# Altium PCB PCB1.PcbDoc
Units mm, origin at the board's own origin, x right, y up, seen from the top; angles counter-clockwise.
Board outline 70 x 90 mm, 2 copper layers (Top Layer, Bottom Layer); 16 components, 62 nets, 154 pads, 165 vias.
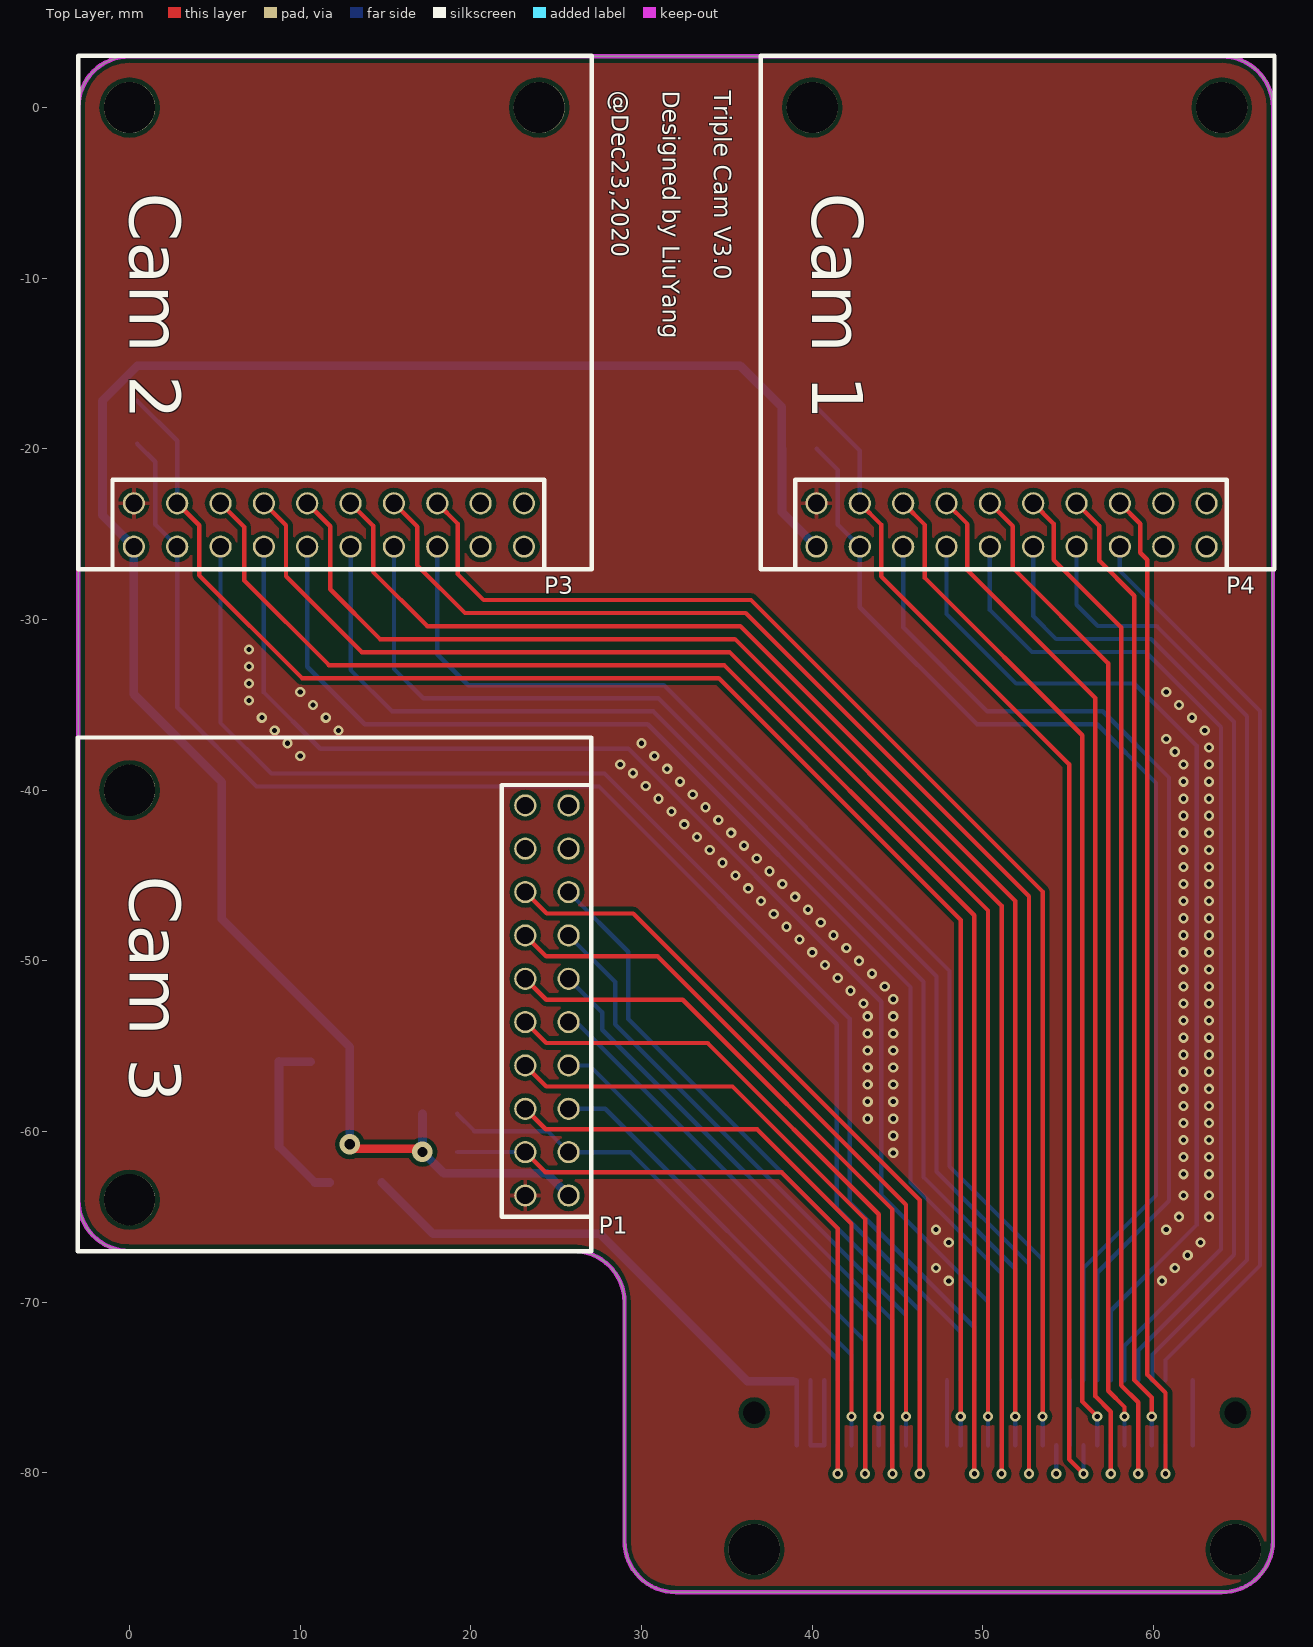
[diagram p0: Top Layer view]
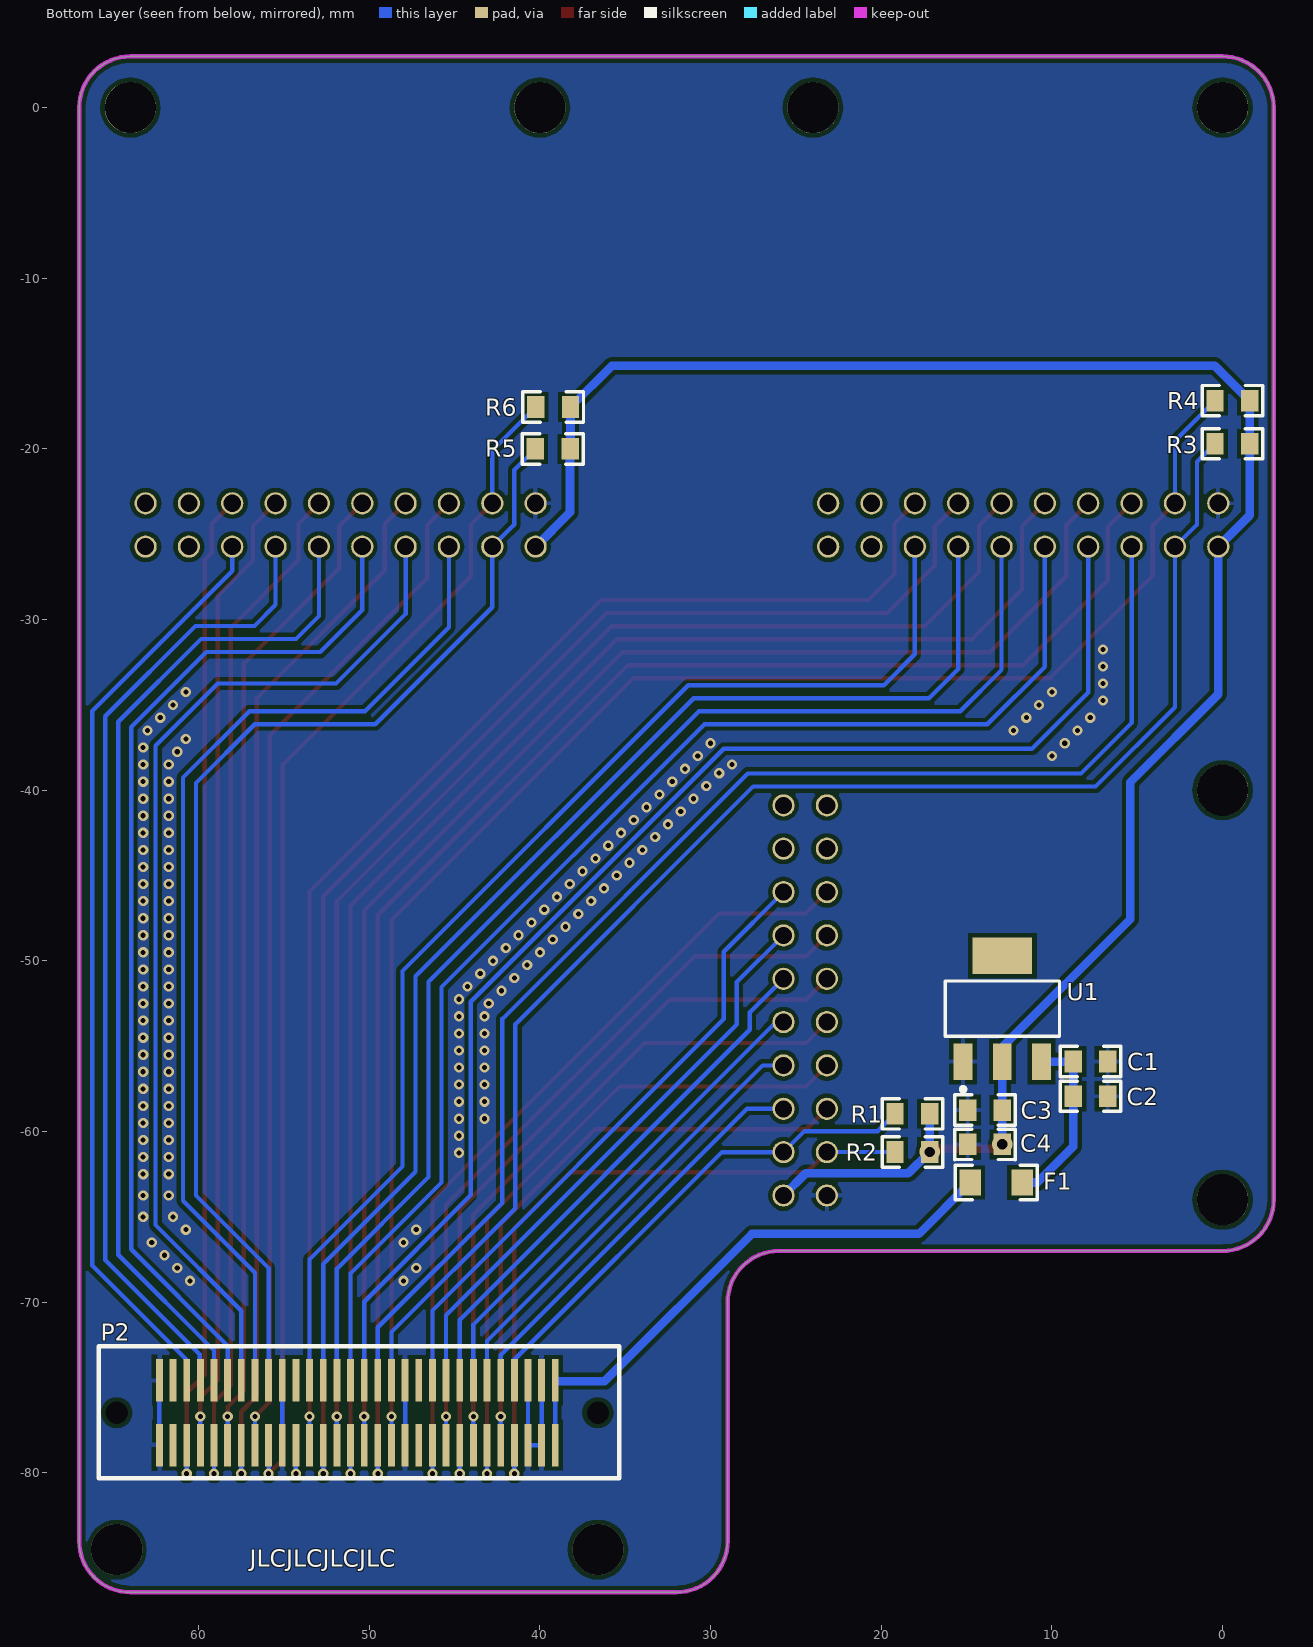
[diagram p1: Bottom Layer view, seen from below]
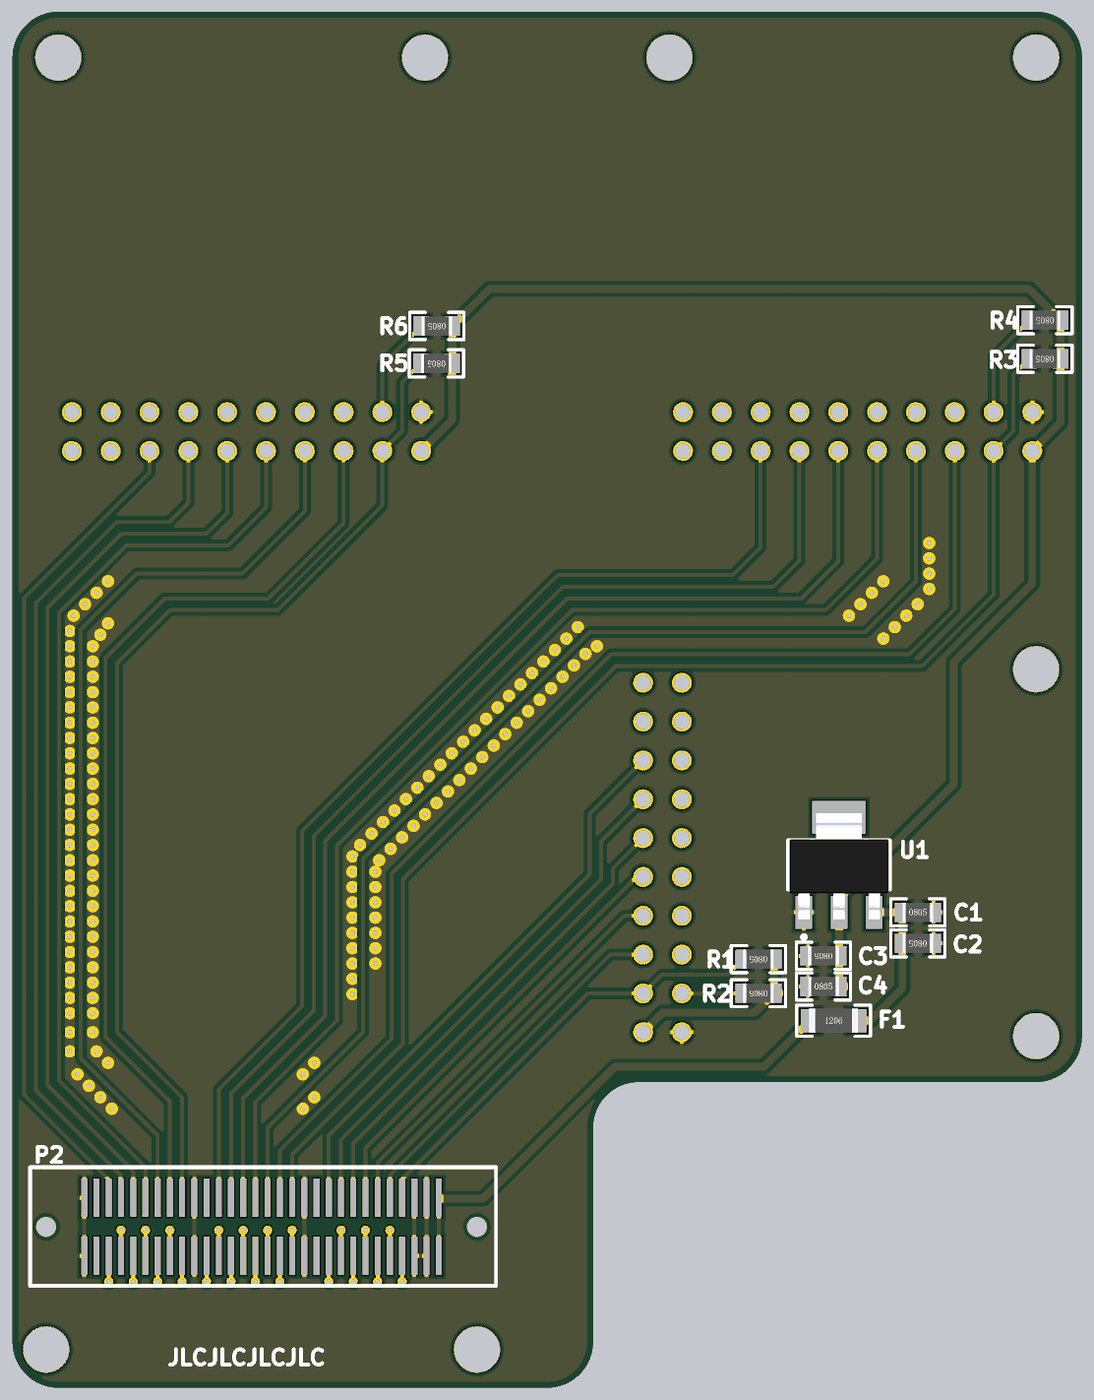
[diagram p2: 3D render of the assembled board from below, using the file's embedded part models]

## Layer stack, top to bottom
Top Solder: solder mask 0.0102, Solder Resist, Dk 3.5
Top Layer: signal copper 0.0356
Dielectric 1: dielectric 0.32, FR-4, Dk 4.8
Bottom Layer: signal copper 0.0356
Bottom Solder: solder mask 0.0102, Solder Resist, Dk 3.5

## Board outline
0,-67 cw(c0,-64) -3,-64 -3,0 cw(c0,0) 0,3 64,3 cw(c64,0) 67,0 67,-84 cw(c64,-84) 64,-87 32,-87 cw(c32,-84) 29,-84 29,-70 ccw(c26,-70) 26,-67

## Design rules (kind name [scope] priority, off if disabled: settings)
Clearance [All] p1: gap=0.254 except(0.508: Track-Track)
PolygonConnect [All] p1: connectstyle=Relief reliefconductorwidth=0.254 reliefentries=4 polygonreliefangle="90 Angle" airgapwidth=0.254
RoutingVias [All] p1: holewidth=0.3 width=0.6 viastyle="Through Hole" minholewidth=0.3 minwidth=0.6 maxholewidth=6 maxwidth=10
SolderMaskExpansion [All] p1: expansion=0.102
Width [All] p1: maxlimit=0.508 minlimit=0.127 preferedwidth=0.254
30 further rules are at their usual default settings.

## Classes and differential pairs
net class C1: D0_1 D0_2 D0_3 D1_1 D1_2 D1_3 D2_1 D2_2 D2_3 D3_1 D3_2 D3_3 D4_1 D4_2 D4_3 D5_1 D5_2 D5_3 D6_1 D6_2 D6_3 D7_1 D7_2 D7_3 HS_1 HS_2 HS_3 PCLK_1 PCLK_2 PCLK_3 SCK_1 SCK_2 SCK_3 SDA_1 SDA_2 SDA_3 VS_1 VS_2 VS_3 XCLK_1 XCLK_2 XCLK_3

## Components (designator, comment, footprint, x,y, rotation, side; value= is the part's Value field where it differs from the comment)
C1 "Cap2" R0805 7.74,-55.902 r180 bottom
C2 "Cap" R0805 7.74,-57.934 r0 bottom
C3 "Cap2" R0805 13.919,-58.747 r0 bottom
C4 "Cap" R0805 13.919,-60.753 r180 bottom
F1 "Fuse 1" R1206 13.259,-62.989 r180 bottom (schematic designator F?)
P1 "Header 10X2" PCBComponent_1 -3,-67 r90 top locked
P2 "Header 30X2" BTBCON_0.8mm_60P 39.1,-74.575 r270 bottom locked
P3 "Header 10X2" PCBComponent_1 -3,3 r0 top locked
P4 "Header 10X2" PCBComponent_1 37,3 r0 top locked
R1 "Res1" R0805 18.177,-58.962 r0 bottom
R2 "Res1" R0805 18.177,-61.197 r0 bottom
R3 "Res1" R0805 -0.575,-19.7 r0 bottom
R4 "Res1" R0805 -0.575,-17.175 r0 bottom
R5 "Res1" R0805 39.25,-20 r0 bottom
R6 "Res1" R0805 39.225,-17.55 r0 bottom
U1 "AMS1117-33" "SOT-223   AMS1117" 12.903,-52.803 r180 bottom

## Footprints (in the part's own frame and the unit in brackets; to place one, negate y for a bottom-side part, rotate by r counter-clockwise, add the part's x,y. Pads: shape width x height; smd on the part's side, far side on the other; paste and mask are expansions set on the pad)
BTBCON_0.8mm_60P [mm]
  rect 2.5x0.4 smd: 1(0,0) 2(3.8,0) 3(0,-0.8) 4(3.8,-0.8) 5(0,-1.6) 6(3.8,-1.6) 7(0,-2.4) 8(3.8,-2.4) 9(0,-3.2) 10(3.8,-3.2) 11(0,-4) 12(3.8,-4) 13(0,-4.8) 14(3.8,-4.8) 15(0,-5.6) 16(3.8,-5.6) 17(0,-6.4) 18(3.8,-6.4) 19(0,-7.2) 20(3.8,-7.2) 21(0,-8) 22(3.8,-8) 23(0,-8.8) 24(3.8,-8.8) 25(0,-9.6) 26(3.8,-9.6) 27(0,-10.4) 28(3.8,-10.4) 29(0,-11.2) 30(3.8,-11.2) 31(0,-12) 32(3.8,-12) 33(0,-12.8) 34(3.8,-12.8) 35(0,-13.6) 36(3.8,-13.6) 37(0,-14.4) 38(3.8,-14.4) 39(0,-15.2) 40(3.8,-15.2) 41(0,-16) 42(3.8,-16) 43(0,-16.8) 44(3.8,-16.8) 45(0,-17.6) 46(3.8,-17.6) 47(0,-18.4) 48(3.8,-18.4) 49(0,-19.2) 50(3.8,-19.2) 51(0,-20) 52(3.8,-20) 53(0,-20.8) 54(3.8,-20.8) 55(0,-21.6) 56(3.8,-21.6) 57(0,-22.4) 58(3.8,-22.4) 59(0,-23.2) 60(3.8,-23.2)
  round 1 hole 1.3: 61(1.9,2.5) 62(1.9,-25.7)
  silkscreen extent -2,-26.75 5.75,3.75
PCBComponent_1 [mm]
  round 3 hole 3: 0(3,-3) 0(27,-3)
  round 1.3 hole 1: 1(3.251,-28.727) 2(3.251,-26.187) 3(5.791,-28.727) 4(5.791,-26.187) 5(8.331,-28.727) 6(8.331,-26.187) 7(10.871,-28.727) 8(10.871,-26.187) 9(13.411,-28.727) 10(13.411,-26.187) 11(15.951,-28.727) 12(15.951,-26.187) 13(18.491,-28.727) 14(18.491,-26.187) 15(21.031,-28.727) 16(21.031,-26.187) 17(23.571,-28.727) 18(23.571,-26.187) 19(26.111,-28.727) 20(26.111,-26.187)
  silkscreen extent -0.01,-30.06 30.09,0.04
R0805 [mil]
  rect 40x50 smd: 1(-40,0) 2(40,0)
  silkscreen extent -70,-35 70,35, body extent -39,-25 39,25, height 22
R1206 [mil]
  rect 50x60 smd: 1(-60,0) 2(60,0)
  silkscreen extent -95,-40 95,40, body extent -63,-31 63,31, height 24
"SOT-223   AMS1117" [mm] "SOT-223/SC-73; 4 Leads; Body 6.7 x 7.3 mm, inc. leads (LxW max)"
  rect 1.1x2.15 smd: 1(-2.3,-3.1) 2(0,-3.1) 3(2.3,-3.1)
  rect 3.5x2.15 smd: 4(0,3.1)
  silkscreen extent -3.35,-4.85 3.35,1.63, body extent -3.25,-3.58 3.25,3.38, height 1.65

## Part data
C1 C2 C3 C4: "Capacitor"
F1: "Fuse"
P1 P3 P4: "Header, 10-Pin, Dual row"
P2: "Header, 30-Pin, Dual row"
R1 R2 R3 R4 R5 R6: "Resistor"
U1: library part "Volt Reg", "Voltage Regulator"

## Via types
v1: diameter 0.6, hole 0.3, Top Layer to Bottom Layer, 161 vias
v2: diameter 1.2, hole 0.6, Top Layer to Bottom Layer, 2 vias
v3: diameter 3, hole 3, Top Layer to Bottom Layer, 2 vias

## Nets (pads, with @x,y where several pads share a name; then routed paths per layer and width w, separated by ;. In a path a pad name is that pad's centre, name@x,y a point inside that pad or via, vN(x,y) a via of type N, cw(c..) or ccw(c..) an arc to the next point about the centre after c; other vN are vias at no path point)
3V3: C3.1 C4.2 P1.1 P3.1 P4.1 R1.1 R2.1 R3.1 R4.1 R5.1 R6.1 U1.2 | length 116.6
  Top Layer w0.508: v2(12.903,-60.753) 13.161,-61.011 16.974,-61.011 v2(17.161,-61.197)
  Bottom Layer w0.508: v2(12.903,-60.753) C3.1 12.903,-55.053 5.4,-47.55 5.4,-39.525 0.251,-34.376 P3.1 -1.591,-23.885 R3.1 R4.1 0.459,-15.125 35.784,-15.125 R6.1 38.209,-19.975 R5.1 38.234,-23.71 P4.1 ; R1.1 v2(17.161,-61.197) 18.413,-62.45 24.429,-62.45 P1.1
5V: F1.1 P2.1 P2.2 | length 32.7
  Bottom Layer w0.254: P2.2 P2.1
  Bottom Layer w0.508: F1.1 17.794,-66 27.575,-66 36.2,-74.625 38.875,-74.625
D0_1: P1.16 P2.20 | length 48.3
  Top Layer w0.254: P1.16 24.442,-47.224 29.509,-47.224 46.3,-64.014 v1(46.3,-80.052)
  Bottom Layer w0.254: v1(46.3,-80.052) P2.20
D0_2: P2.38 P3.16 | length 79.1
  Top Layer w0.254: P3.16 19.222,-24.379 19.222,-27.335 20.746,-28.859 36.418,-28.859 53.5,-45.941 v1(53.5,-76.698)
  Bottom Layer w0.254: P2.38 v1(53.5,-76.698)
D0_3: P2.56 P4.16 | length 59.6
  Top Layer w0.254: P4.16 59.227,-24.384 59.227,-26.091 59.634,-26.497 59.634,-74.244 60.7,-75.31 v1(60.7,-80.052)
  Bottom Layer w0.254: v1(60.7,-80.052) P2.56
D1_1: P1.15 P2.19 | length 37.1
  Bottom Layer w0.254: P1.15 29.224,-49.465 29.224,-53.408 46.3,-70.484 P2.19
D1_2: P2.37 P3.15 | length 70.3
  Bottom Layer w0.254: P3.15 18.031,-32.037 19.844,-33.85 31.308,-33.85 48.05,-50.592 48.05,-62.042 53.5,-67.492 P2.37
D1_3: P2.55 P4.15 | length 54.5
  Bottom Layer w0.254: P4.15 58.031,-27.148 66.238,-35.355 66.238,-67.848 60.7,-73.386 P2.55
D2_1: P1.14 P2.18 | length 42.9
  Top Layer w0.254: P1.14 24.417,-49.738 30.946,-49.738 45.5,-64.292 v1(45.5,-76.698)
  Bottom Layer w0.254: P2.18 v1(45.5,-76.698)
D2_2: P2.36 P3.14 | length 83.6
  Top Layer w0.254: P3.14 16.86,-24.556 16.86,-26.827 19.654,-29.621 36.103,-29.621 52.7,-46.219 v1(52.7,-80.052)
  Bottom Layer w0.254: v1(52.7,-80.052) P2.36
D2_3: P2.54 P4.14 | length 57
  Top Layer w0.254: P4.14 56.814,-24.511 56.814,-26.548 58.872,-28.605 58.872,-74.559 59.9,-75.587 v1(59.9,-76.698)
  Bottom Layer w0.254: P2.54 v1(59.9,-76.698)
D3_1: P1.13 P2.17 | length 34.3
  Bottom Layer w0.254: P1.13 28.462,-51.243 28.462,-53.724 45.5,-70.762 P2.17
D3_2: P2.35 P3.13 | length 72.3
  Bottom Layer w0.254: P3.13 15.491,-32.901 17.203,-34.612 30.992,-34.612 47.288,-50.908 47.288,-62.358 52.7,-67.77 P2.35
D3_3: P2.53 P4.13 | length 57.3
  Bottom Layer w0.254: P4.13 55.491,-29.136 56.731,-30.376 60.181,-30.376 65.476,-35.671 65.476,-67.533 59.938,-73.071 59.938,-74.537 P2.53
D4_1: P1.12 P2.16 | length 44.3
  Top Layer w0.254: P1.12 24.417,-52.278 32.409,-52.278 44.7,-64.569 v1(44.7,-80.052)
  Bottom Layer w0.254: v1(44.7,-80.052) P2.16
D4_2: P2.34 P3.12 | length 82.1
  Top Layer w0.254: P3.12 14.269,-24.506 14.269,-27.208 17.444,-30.383 35.787,-30.383 51.9,-46.496 v1(51.9,-76.698)
  Bottom Layer w0.254: P2.34 v1(51.9,-76.698)
D4_3: P2.52 P4.12 | length 61.1
  Top Layer w0.254: P4.12 54.147,-24.384 54.147,-26.497 58.11,-30.46 58.11,-74.875 59.1,-75.865 v1(59.1,-80.052)
  Bottom Layer w0.254: v1(59.1,-80.052) P2.52
D5_1: P1.11 P2.15 | length 31.4
  Bottom Layer w0.254: P1.11 27.7,-53.021 27.7,-54.039 44.7,-71.039 P2.15
D5_2: P2.33 P3.11 | length 73.9
  Bottom Layer w0.254: P3.11 12.951,-32.951 15.374,-35.374 30.677,-35.374 46.526,-51.223 46.526,-62.673 51.9,-68.047 P2.33
D5_3: P2.51 P4.11 | length 59.3
  Bottom Layer w0.254: P4.11 52.951,-29.797 54.292,-31.138 59.866,-31.138 64.714,-35.986 64.714,-67.217 59.1,-72.831 P2.51
D6_1: P1.10 P2.14 | length 38.9
  Top Layer w0.254: P1.10 24.417,-54.818 33.871,-54.818 43.9,-64.847 v1(43.9,-76.698)
  Bottom Layer w0.254: P2.14 v1(43.9,-76.698)
D6_2: P2.32 P3.10 | length 87.6
  Top Layer w0.254: P3.10 11.755,-24.531 11.755,-28.224 14.676,-31.145 35.471,-31.145 51.1,-46.774 v1(51.1,-80.052)
  Bottom Layer w0.254: v1(51.1,-80.052) P2.32
D6_3: P2.50 P4.10 | length 58.5
  Top Layer w0.254: P4.10 51.76,-24.536 51.76,-26.98 57.348,-32.568 57.348,-75.191 58.3,-76.143 v1(58.3,-76.698)
  Bottom Layer w0.254: P2.50 v1(58.3,-76.698)
D7_1: P1.9 P2.13 | length 28.8
  Bottom Layer w0.254: P1.9 26.172,-53.589 43.9,-71.317 P2.13
D7_2: P2.31 P3.9 | length 75.4
  Bottom Layer w0.254: P3.9 10.411,-32.761 13.786,-36.136 30.361,-36.136 45.764,-51.539 45.764,-62.989 51.1,-68.325 P2.31
D7_3: P2.49 P4.9 | length 60.7
  Bottom Layer w0.254: P4.9 50.411,-29.436 52.875,-31.9 59.55,-31.9 63.952,-36.302 63.952,-66.901 58.3,-72.553 P2.49
FREX_1: P1.19
FREX_2: P3.19
FREX_3: P4.19
GND: C1.2 C2.1 C3.2 C4.1 P1.2 P2.3 P2.4 P2.5 P2.6 P2.23 P2.24 P2.41 P2.42 P2.59 P2.60 P3.2 P4.2 U1.1 | length 19.8
  Bottom Layer w0.254: P2.3 P2.4 P2.6 P2.5 ; P2.24 P2.23 ; P2.42 P2.41 ; P2.60 P2.59
  other v1: 48,-68.75 60.5,-68.75 47.25,-68 61.25,-68 62,-67.25 48,-66.5 62.75,-66.5 47.25,-65.75 60.75,-65.75 61.5,-65 63.25,-65 61.75,-63.75 63.25,-63.75 61.75,-62.5 63.25,-62.5 61.75,-61.5 63.25,-61.5 44.75,-61.25 61.75,-60.5 63.25,-60.5 44.75,-60.25 61.75,-59.5 63.25,-59.5 43.25,-59.25 44.75,-59.25 61.75,-58.5 63.25,-58.5 43.25,-58.25 44.75,-58.25 61.75,-57.5 63.25,-57.5 43.25,-57.25 44.75,-57.25 61.75,-56.5 63.25,-56.5 43.25,-56.25 44.75,-56.25 61.75,-55.5 63.25,-55.5 43.25,-55.25 44.75,-55.25 61.75,-54.5 63.25,-54.5 43.25,-54.25 44.75,-54.25 61.75,-53.5 63.25,-53.5 43.25,-53.25 44.75,-53.25 43,-52.5 61.75,-52.5 63.25,-52.5 44.75,-52.25 42.25,-51.75 44.25,-51.5 61.75,-51.5 63.25,-51.5 41.5,-51 43.5,-50.75 61.75,-50.5 63.25,-50.5 40.75,-50.25 42.75,-50 40,-49.5 61.75,-49.5 63.25,-49.5 42,-49.25 39.25,-48.75 41.25,-48.5 61.75,-48.5 63.25,-48.5 38.5,-48 40.5,-47.75 61.75,-47.5 63.25,-47.5 37.75,-47.25 39.75,-47 37,-46.5 61.75,-46.5 63.25,-46.5 39,-46.25 36.25,-45.75 38.25,-45.5 61.75,-45.5 63.25,-45.5 35.5,-45 37.5,-44.75 61.75,-44.5 63.25,-44.5 34.75,-44.25 36.75,-44 34,-43.5 61.75,-43.5 63.25,-43.5 36,-43.25 33.25,-42.75 35.25,-42.5 61.75,-42.5 63.25,-42.5 32.5,-42 34.5,-41.75 61.75,-41.5 63.25,-41.5 31.75,-41.25 33.75,-41 31,-40.5 61.75,-40.5 63.25,-40.5 33,-40.25 30.25,-39.75 32.25,-39.5 61.75,-39.5 63.25,-39.5 29.5,-39 31.5,-38.75 28.75,-38.5 61.75,-38.5 63.25,-38.5 10,-38 30.75,-38 61.25,-37.75 63.25,-37.5 9.25,-37.25 30,-37.25 60.75,-37 8.5,-36.5 12.25,-36.5 63,-36.5 7.75,-35.75 11.5,-35.75 62.25,-35.75 10.75,-35 61.5,-35 7,-34.75 10,-34.25 60.75,-34.25 7,-33.75 7,-32.75 7,-31.75
HS_1: P1.6 P2.10 | length 34.9
  Top Layer w0.254: P1.6 24.391,-59.873 36.77,-59.873 42.3,-65.402 v1(42.3,-76.698)
  Bottom Layer w0.254: P2.10 v1(42.3,-76.698)
HS_2: P2.28 P3.6 | length 90.4
  Top Layer w0.254: P3.6 6.726,-24.582 6.726,-27.716 11.679,-32.669 34.84,-32.669 49.5,-47.329 v1(49.5,-80.052)
  Bottom Layer w0.254: v1(49.5,-80.052) P2.28
HS_3: P2.46 P4.6 | length 59.9
  Top Layer w0.254: P4.6 46.604,-24.46 46.604,-27.564 55.824,-36.784 55.824,-75.822 v1(56.7,-76.698)
  Bottom Layer w0.254: P2.46 v1(56.7,-76.698)
NetC1_1: C1.1 C2.2 F1.2 U1.3 | length 10.7
  Bottom Layer w0.508: U1.3 C1.1 C1.1 C2.2 8.756,-60.881 10.864,-62.989 F1.2
PCLK_1: P1.7 P2.11 | length 26.4
  Bottom Layer w0.254: P1.7 26.954,-56.129 43.1,-72.275 P2.11
PCLK_2: P2.29 P3.7 | length 77
  Bottom Layer w0.254: P3.7 7.871,-34.271 11.175,-37.575 29.23,-37.575 44.05,-52.395 44.05,-63.725 50.3,-69.975 P2.29
PCLK_3: P2.47 P4.7 | length 61.1
  Bottom Layer w0.254: P4.7 47.871,-29.671 51.95,-33.75 58.875,-33.75 62.525,-37.4 62.525,-65.475 57.5,-70.5 P2.47
PWDN_1: P1.18
PWDN_2: P3.18
PWDN_3: P4.18
RST_1: P1.17
RST_2: P3.17
RST_3: P4.17
SCK_1: P1.3 P2.7 R1.2 | length 29.5
  Bottom Layer w0.254: R1.2 20.205,-59.975 24.494,-59.975 P1.3 29.331,-61.209 41.5,-73.378 P2.7
SCK_2: P2.25 P3.3 R3.2 | length 86.6
  Bottom Layer w0.254: R3.2 1.5,-20.759 1.5,-24.436 P3.3 2.791,-35.136 7.442,-39.787 27.509,-39.787 41.438,-53.716 41.438,-64.491 48.7,-71.753 P2.25
SCK_3: P2.43 P4.3 R5.2 | length 68.7
  Bottom Layer w0.254: R5.2 41.5,-21.234 41.5,-24.436 P4.3 42.791,-29.274 49.654,-36.137 56.709,-36.137 60.15,-39.578 60.15,-63.747 55.9,-67.997 P2.43
SDA_1: P1.4 P2.8 R2.2 | length 40.2
  Top Layer w0.254: P1.4 24.366,-62.387 38.207,-62.387 41.5,-65.68 v1(41.5,-80.052)
  Bottom Layer w0.254: R2.2 23.176,-61.197 P1.4 ; v1(41.5,-80.052) P2.8
SDA_2: P2.26 P3.4 R4.2 | length 95.5
  Top Layer w0.254: P3.4 4.084,-24.48 4.084,-27.412 10.104,-33.431 34.524,-33.431 48.7,-47.607 v1(48.7,-76.698)
  Bottom Layer w0.254: R4.2 2.791,-19.525 P3.4 ; P2.26 v1(48.7,-76.698)
SDA_3: P2.44 P4.4 R6.2 | length 70.7
  Top Layer w0.254: P4.4 44.038,-24.434 44.038,-27.462 55.062,-38.486 55.062,-79.214 v1(55.9,-80.052)
  Bottom Layer w0.254: R6.2 42.791,-20.1 P4.4 ; v1(55.9,-80.052) P2.44
STRO_1: P1.20
STRO_2: P3.20
STRO_3: P4.20
T10: P2.58
T11: P2.57
V16: P2.39
VS_1: P1.5 P2.9 | length 24
  Bottom Layer w0.254: P1.5 27.869,-58.669 42.3,-73.1 P2.9
VS_2: P2.27 P3.5 | length 78.6
  Bottom Layer w0.254: P3.5 5.331,-36.056 8.3,-39.025 27.825,-39.025 42.2,-53.4 42.2,-64.175 49.5,-71.475 P2.27
VS_3: P2.45 P4.5 | length 61
  Bottom Layer w0.254: P4.5 45.331,-30.456 50.25,-35.375 57.025,-35.375 60.912,-39.262 60.912,-64.063 56.7,-68.275 P2.45
W16: P2.40 | length 1.7
  Bottom Layer w0.254: v1(54.3,-80.052) P2.40
XCLK_1: P1.8 P2.12 | length 40.2
  Top Layer w0.254: P1.8 24.417,-57.358 35.333,-57.358 43.1,-65.125 v1(43.1,-80.052)
  Bottom Layer w0.254: v1(43.1,-80.052) P2.12
XCLK_2: P2.30 P3.8 | length 85.4
  Top Layer w0.254: P3.8 9.164,-24.48 9.164,-27.462 13.609,-31.907 35.156,-31.907 50.3,-47.052 v1(50.3,-76.698)
  Bottom Layer w0.254: P2.30 v1(50.3,-76.698)
XCLK_3: P2.48 P4.8 | length 62.5
  Top Layer w0.254: P4.8 49.093,-24.409 49.093,-27.107 56.586,-34.6 56.586,-75.506 57.5,-76.42 v1(57.5,-80.052)
  Bottom Layer w0.254: v1(57.5,-80.052) P2.48
pads on no net: P1.0 P2.21 P2.22 P2.61 P2.62 P3.0 P4.0 U1.4
copper on no net:
  other v3: 36.6,-84.5 64.8,-84.5

## Polygon pours and split planes (outlines as drawn)
GND on Top Layer "Top Layer-No Net" (solid, remove dead copper, pour order 16): -7.976,6.299 84.252,6.299 85.573,4.978 74.752,-5.842 74.752,-97.003 27.559,-97.003 22.733,-92.177 24.282,-90.627 24.282,-72.796 -7.442,-72.796 -8.103,-73.457
GND on Bottom Layer "Top Layer-No Net" (solid, remove dead copper, pour order 18): -6.274,6.553 -6.147,6.68 71.501,6.68 71.501,-90.119 69.571,-92.05 69.317,-92.304 26.365,-92.304 26.365,-74.092 23.52,-71.247 23.139,-71.628 -10.693,-71.628

## Keep-outs
Keep-Out Layer:
  the board outline again, w0.254

## Silkscreen, mask and mechanical layers (free items; w line width, h text height)
Top Overlay:
  text "@Dec23,2020" at 28.25,1 h1 r270
  text "Designed by LiuYang" at 31.25,1 h1 r270
  text "Triple Cam V3.0" at 34.25,1 h1 r270
  text "Cam 2" at 0,-5 h3 r270
  text "Cam 1" at 40,-5 h3 r270
  text "Cam 3" at 0,-45 h3 r270
Bottom Overlay:
  text "JLCJLCJLCJLC" at 57,-85.5 h1
Mechanical 1:
  the board outline again, w0.254